# EAGLE board JTAG adapter (EAGLE 6.3)
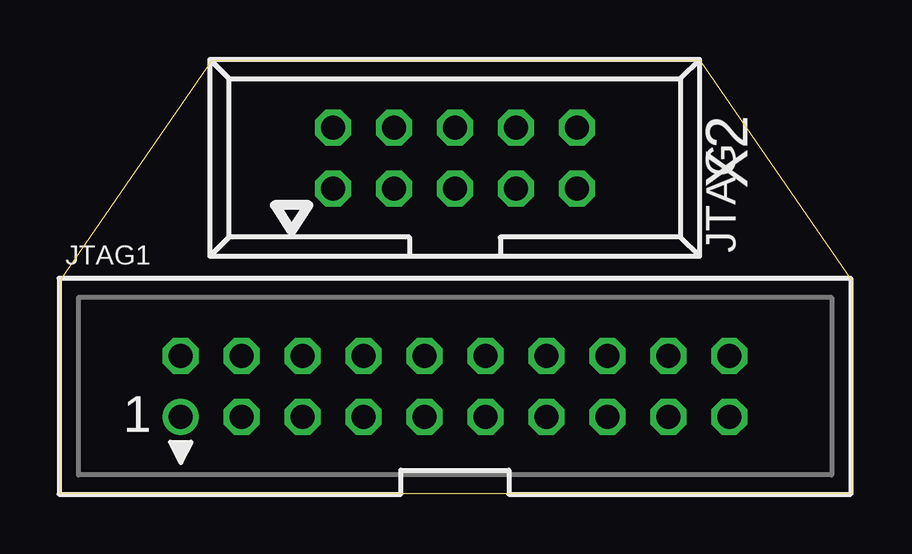
[diagram p0: board, top side]
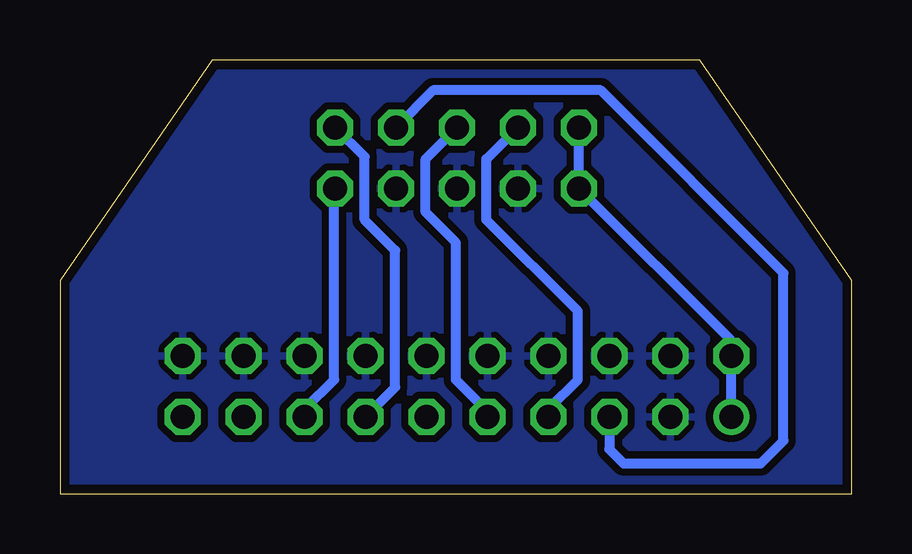
[diagram p1: board, bottom side, seen from below]

Size 33.02 x 18.1 mm. Coordinates in mm from the lower left corner, seen from the top.
Outline: 0,0 0,8.89 6.35,18.1 26.67,18.1 33.02,8.89 33.02,0 0,0
Copper layers (1*16): Top 0.0356mm / dielectric 1.5011mm / Bottom 0.0356mm
Design rules "LaenPCBOrder *": minimum track width 6mil, minimum drill 13mil, track to track 12mil, track to pad 12mil, pad to pad 12mil, via to via 12mil, smd to smd 6mil, copper to edge 15mil, drill to drill 6mil, minimum pad ring 7mil, minimum via ring 7mil, stop-mask expansion 3mil, vias tented up to drill 0mil, thermal gap 10mil

## Footprints (pad centres in the part's own frame; a part is rotated, then mirrored left to right if it is on the bottom)
JTAG-ARM = drill 1: 1 -11.43,-1.27 | drill 1 octagon: 2 -11.43,1.27; 3 -8.89,-1.27; 4 -8.89,1.27; 5 -6.35,-1.27; 6 -6.35,1.27; 7 -3.81,-1.27; 8 -3.81,1.27; 9 -1.27,-1.27; 10 -1.27,1.27; 11 1.27,-1.27; 12 1.27,1.27; 13 3.81,-1.27; 14 3.81,1.27; 15 6.35,-1.27; 16 6.35,1.27; 17 8.89,-1.27; 18 8.89,1.27; 19 11.43,-1.27; 20 11.43,1.27
057-010-1 = drill 1 octagon: 1 -5.08,-1.27; 2 -5.08,1.27; 3 -2.54,-1.27; 4 -2.54,1.27; 5 0,-1.27; 6 0,1.27; 7 2.54,-1.27; 8 2.54,1.27; 9 5.08,-1.27; 10 5.08,1.27

## Placement (x,y rotation side)
JTAG1  JTAG-ARM  [JTAG-ARM]  16.47,4.49 0 top
X2  057-010-1  [057-010-1]  16.46,14.01 0 top

## Library data of the parts
JTAG1 = microbuilder
X2 = con-panduit; OC_FARNELL: unknown; OC_NEWARK: unknown

## Nets
3.3V: JTAG1.1 JTAG1.2 X2.1 X2.2
GND: JTAG1.3 JTAG1.4 JTAG1.6 JTAG1.8 JTAG1.10 JTAG1.12 JTAG1.14 JTAG1.16 JTAG1.18 JTAG1.20 X2.3 X2.5 X2.7
JTAG_TCK: JTAG1.9 X2.6
JTAG_TDI: JTAG1.5 X2.8
JTAG_TDO: JTAG1.13 X2.10
JTAG_TMS: JTAG1.7 X2.4
RESET: JTAG1.15 X2.9

## Tracks (layer width: path | path; a pad name or v marks a point on that pad's centre or on a via)
3.3V
  Bottom 0.406: JTAG1.1 JTAG1.2 5.04,6.39 X2.1 X2.2
GND
  pour Bottom: 0,0 0,8.89 6.35,18.1 26.67,18.1 33.02,8.89 33.02,0
JTAG_TCK
  Bottom 0.406: X2.6 17.78,13.97 17.78,11.75 16.51,10.48 16.51,4.76 15.2,3.45 JTAG1.9
JTAG_TDI
  Bottom 0.406: JTAG1.5 10.12,1.86 9.52,1.27 3.81,1.27 2.86,2.22 2.86,9.21 10.48,16.83 17.46,16.83 X2.8
JTAG_TDO
  Bottom 0.406: JTAG1.13 19.05,4.45 19.05,10.16 20.32,11.43 20.32,14.06 X2.10
JTAG_TMS
  Bottom 0.406: X2.4 15.24,13.97 15.24,11.43 11.43,7.62 11.43,4.76 12.66,3.54 JTAG1.7
RESET
  Bottom 0.406: X2.9 21.59,12.7 21.59,4.76 22.82,3.54 JTAG1.15

## Text on the board
tSilk: JTAG